# Altium PCB NewFc.PcbDoc
Units mil, origin at the board's own origin, x right, y up, seen from the top; angles counter-clockwise.
Board outline 3470 x 1220 mil, 2 copper layers (Top Layer, Bottom Layer); 2 components, 56 nets, 80 pads, 0 vias.
Unrouted connection lines stored in the file: 22.
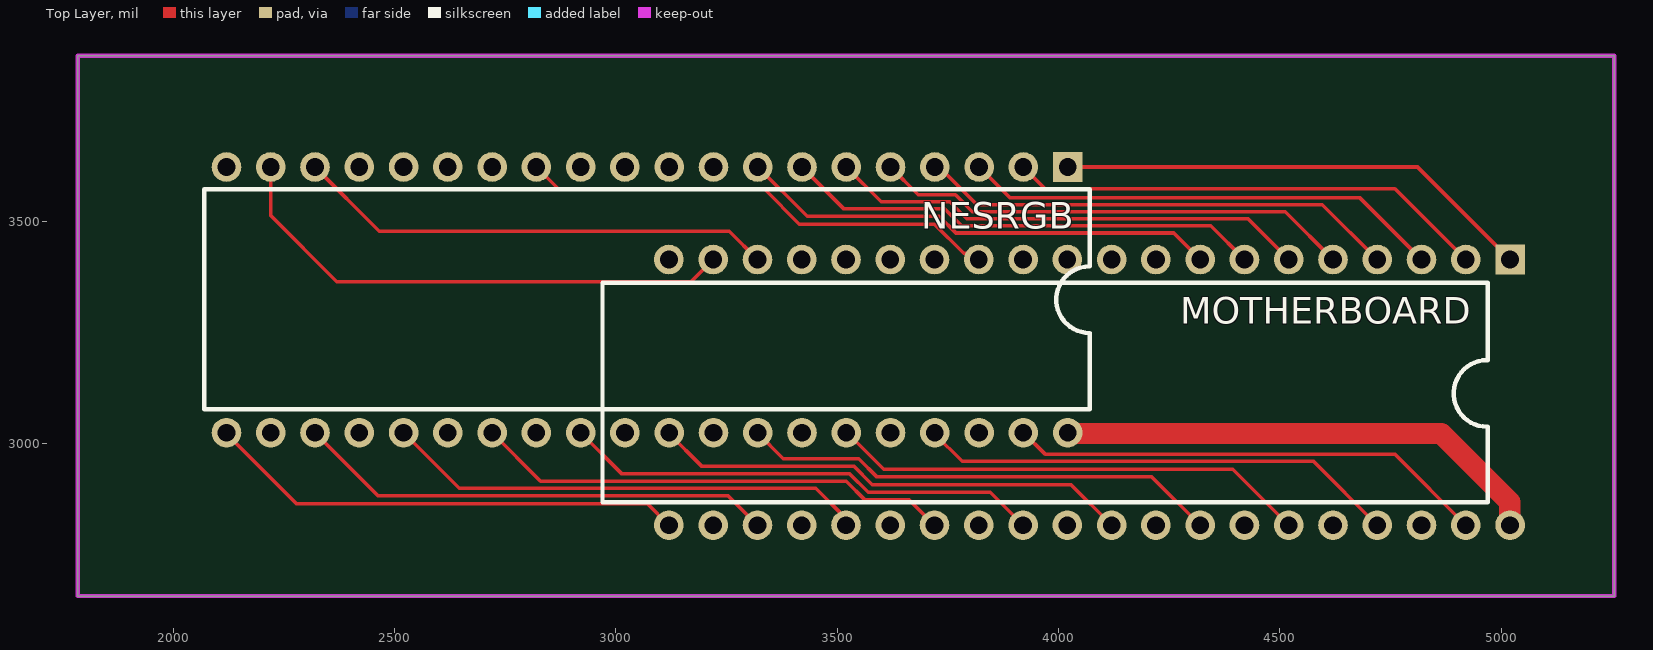
[diagram p0: Top Layer view]
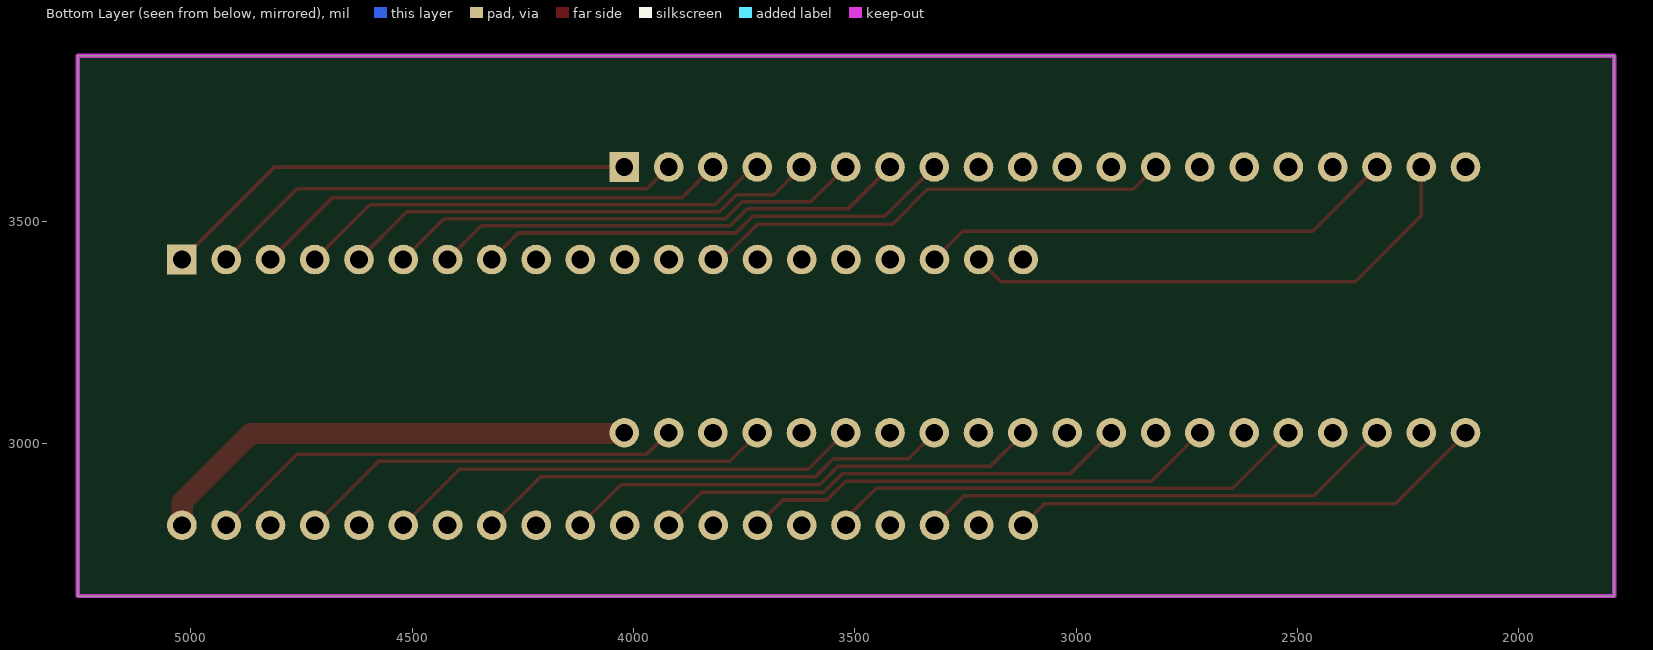
[diagram p1: Bottom Layer view, seen from below]

## Layer stack, top to bottom
Top Solder: solder mask 0.4, Solder Resist, Dk 3.5
Top Layer: signal copper 1.4
Dielectric 1: dielectric 12.6, FR-4, Dk 4.8
Bottom Layer: signal copper 1.4
Bottom Solder: solder mask 0.4, Solder Resist, Dk 3.5

## Board outline
1785,2655 1785,3875 5255,3875 5255,2655

## Design rules (kind name [scope] priority, off if disabled: settings)
Clearance [All] p1: gap=8 ignorepadtopadclearanceinfootprint=FALSE except(0: Arc-Hole Track-Hole SMDPad-Hole THPad-Hole Via-Hole Fill-Hole Poly-Hole Region-Hole Text-Hole)
PolygonConnect [All] p1: connectstyle=Relief reliefconductorwidth=10 reliefentries=4 polygonreliefangle="90 Angle" airgapwidth=10
RoutingVias [All] p1: holewidth=28 width=50 viastyle="Through Hole" minholewidth=28 minwidth=50 maxholewidth=28 maxwidth=50
SolderMaskExpansion [All] p1: expansion=4 istentingtop=FALSE
Width [All] p1: maxlimit=8 minlimit=8 preferedwidth=8 minimp=50.000000 maximp=50.000000 favimp=50.000000
30 further rules are at their usual default settings.

## Classes and differential pairs
component class NewFc: NESRGB

## Components (designator, comment, footprint, x,y, rotation, side; value= is the part's Value field where it differs from the comment)
MOTHERBOARD "PPU" "DIP40-NEW - T" 3945,3135 r270 top
NESRGB "PPU" DIP40-NEW 2945.62,3344.04 r270 top

## Footprints (in the part's own frame and the unit in brackets; to place one, negate y for a bottom-side part, rotate by r counter-clockwise, add the part's x,y. Pads: shape width x height; smd on the part's side, far side on the other; paste and mask are expansions set on the pad)
DIP40-NEW [mil]
  rect 66.93x66.93 hole 40: 1(-280,1075)
  round 66.93 hole 40: 2(-280,975) 3(-280,875) 4(-280,775) 5(-280,675) 6(-280,575) 7(-280,475) 8(-280,375) 9(-280,275) 10(-280,175) 11(-280,75) 12(-280,-25) 13(-280,-125) 14(-280,-225) 15(-280,-325) 16(-280,-425) 17(-280,-525) 18(-280,-625) 19(-280,-725) 20(-280,-825) 21(320,-825) 22(320,-725) 23(320,-625) 24(320,-525) 25(320,-425) 26(320,-325) 27(320,-225) 28(320,-125) 29(320,-25) 30(320,75) 31(320,175) 32(320,275) 33(320,375) 34(320,475) 35(320,575) 36(320,675) 37(320,775) 38(320,875) 39(320,975) 40(320,1075)
  silkscreen extent -229,-875 267,1125
"DIP40-NEW - T" [mil]
  rect 66.93x66.93 hole 40: 1(-280,1075)
  round 66.93 hole 40: 2(-280,975) 3(-280,875) 4(-280,775) 5(-280,675) 6(-280,575) 7(-280,475) 8(-280,375) 9(-280,275) 10(-280,175) 11(-280,75) 12(-280,-25) 13(-280,-125) 14(-280,-225) 15(-280,-325) 16(-280,-425) 17(-280,-525) 18(-280,-625) 19(-280,-725) 20(-280,-825) 21(320,-825) 22(320,-725) 23(320,-625) 24(320,-525) 25(320,-425) 26(320,-325) 27(320,-225) 28(320,-125) 29(320,-25) 30(320,75) 31(320,175) 32(320,275) 33(320,375) 34(320,475) 35(320,575) 36(320,675) 37(320,775) 38(320,875) 39(320,975) 40(320,1075)
  silkscreen extent -228,-975 268,1025

## Part data
MOTHERBOARD NESRGB: library part UMC6528

## Nets (pads, with @x,y where several pads share a name; then routed paths per layer and width w, separated by ;. In a path a pad name is that pad's centre, name@x,y a point inside that pad or via, vN(x,y) a via of type N, cw(c..) or ccw(c..) an arc to the next point about the centre after c; other vN are vias at no path point)
A0: MOTHERBOARD.12 NESRGB.12
A1: MOTHERBOARD.11 NESRGB.11
A2: MOTHERBOARD.10 NESRGB.10
CLK: MOTHERBOARD.18 NESRGB.18 | length 1086
  Top Layer w8: NESRGB.18 2465.66,3479 3256,3479 MOTHERBOARD.18
D0: MOTHERBOARD.2 NESRGB.2 | length 1086
  Top Layer w8: NESRGB.2 3969.66,3575 4760,3575 MOTHERBOARD.2
D1: MOTHERBOARD.3 NESRGB.3 | length 1086
  Top Layer w8: NESRGB.3 3889.66,3555 4680,3555 MOTHERBOARD.3
D2: MOTHERBOARD.4 NESRGB.4 | length 1086
  Top Layer w8: NESRGB.4 3730.96,3624.04 3816,3539 4596,3539 MOTHERBOARD.4
D3: MOTHERBOARD.5 NESRGB.5 | length 1086
  Top Layer w8: NESRGB.5 3683.4,3561.26 3767.19,3561.26 3805.45,3523 4512,3523 MOTHERBOARD.5
D4: MOTHERBOARD.6 NESRGB.6 | length 1086
  Top Layer w8: NESRGB.6 3599.4,3545.26 3754.74,3545.26 3793,3507 4428,3507 MOTHERBOARD.6
D5: MOTHERBOARD.7 NESRGB.7 | length 1086
  Top Layer w8: NESRGB.7 3515.4,3529.26 3743.1,3529.26 3781.36,3491 4344,3491 MOTHERBOARD.7
D6: MOTHERBOARD.8 NESRGB.8 | length 1086
  Top Layer w8: NESRGB.8 3432.11,3512.55 3730.88,3512.55 3768.42,3475 4260,3475 MOTHERBOARD.8
D7: MOTHERBOARD.9 NESRGB.9
DBE: MOTHERBOARD.13 NESRGB.13 | length 1086
  Top Layer w8: NESRGB.13 2871.15,3573.51 3336.15,3573.51 3414.66,3495 3720,3495 3785.85,3429.15 3789.91,3429.15 3804.05,3415 MOTHERBOARD.13
GND: MOTHERBOARD.14 MOTHERBOARD.15 MOTHERBOARD.16 MOTHERBOARD.17 MOTHERBOARD.20 NESRGB.14 NESRGB.15 NESRGB.16 NESRGB.17 NESRGB.20 | length 14
  Top Layer w8: MOTHERBOARD.14 MOTHERBOARD.14@3720,3429
"NetMain Board_21": 
"NetMain Board_22": 
"NetMain Board_23": 
"NetMain Board_24": 
"NetMain Board_25": 
"NetMain Board_26": 
"NetMain Board_27": 
"NetMain Board_28": 
"NetMain Board_29": 
"NetMain Board_30": 
"NetMain Board_31": 
"NetMain Board_32": 
"NetMain Board_33": 
"NetMain Board_34": 
"NetMain Board_35": 
"NetMain Board_36": 
"NetMain Board_37": 
"NetMain Board_38": 
"NetMain Board_39": 
"NetMain Board_40": 
NetMOTHERBOARD_21: MOTHERBOARD.21 NESRGB.21 | length 1087.3
  Top Layer w8: NESRGB.21 2120.62,3021.77 2278.61,2863.79 3071.21,2863.79 MOTHERBOARD.21
NetMOTHERBOARD_22: MOTHERBOARD.22 NESRGB.22
NetMOTHERBOARD_23: MOTHERBOARD.23 NESRGB.23 | length 1086.3
  Top Layer w8: NESRGB.23 2320.62,3023.52 2462.29,2881.85 3253.15,2881.85 MOTHERBOARD.23
NetMOTHERBOARD_24: MOTHERBOARD.24 NESRGB.24
NetMOTHERBOARD_25: MOTHERBOARD.25 NESRGB.25 | length 1084.8
  Top Layer w8: NESRGB.25@2527.79,3017.21 2646.57,2898.43 3451.57,2898.43 3520,2830 MOTHERBOARD.25
NetMOTHERBOARD_26: MOTHERBOARD.26 NESRGB.26
NetMOTHERBOARD_27: MOTHERBOARD.27 NESRGB.27 | length 1086.1
  Top Layer w8: NESRGB.27 2720.62,3023.88 2830.08,2914.43 3520.4,2914.43 3562.96,2871.86 3663.14,2871.86 MOTHERBOARD.27
NetMOTHERBOARD_28: MOTHERBOARD.28 NESRGB.28
NetMOTHERBOARD_29: MOTHERBOARD.29 NESRGB.29 | length 1086
  Top Layer w8: NESRGB.29 2920.68,3024.04 3013.97,2930.75 3528.67,2930.75 3570.02,2889.4 3845.6,2889.4 MOTHERBOARD.29
NetMOTHERBOARD_30: MOTHERBOARD.30 NESRGB.30
NetMOTHERBOARD_31: MOTHERBOARD.31 NESRGB.31 | length 1087.5
  Top Layer w8: NESRGB.31 3120.62,3021.36 3193.48,2948.5 3537.29,2948.5 3579.13,2906.66 4028.34,2906.66 MOTHERBOARD.31
NetMOTHERBOARD_32: MOTHERBOARD.32 NESRGB.32
NetMOTHERBOARD_33: MOTHERBOARD.33 NESRGB.33 | length 1086.5
  Top Layer w8: NESRGB.33 3320.62,3023.19 3378.4,2965.41 3548.53,2965.41 3589.96,2923.98 4211.02,2923.98 MOTHERBOARD.33
NetMOTHERBOARD_34: MOTHERBOARD.34 NESRGB.34
NetMOTHERBOARD_35: MOTHERBOARD.35 NESRGB.35 | length 1086
  Top Layer w8: NESRGB.35 3522.56,3024.04 3605.23,2941.37 4393.63,2941.37 MOTHERBOARD.35
NetMOTHERBOARD_36: MOTHERBOARD.36 NESRGB.36
NetMOTHERBOARD_37: MOTHERBOARD.37 NESRGB.37 | length 1088
  Top Layer w8: NESRGB.37 3720.62,3020.6 3782.23,2959 4576,2959 MOTHERBOARD.37
NetMOTHERBOARD_38: MOTHERBOARD.38 NESRGB.38
NetMOTHERBOARD_39: MOTHERBOARD.39 NESRGB.39 | length 1086
  Top Layer w8: NESRGB.39 3921.13,3024.04 3969.57,2975.6 4759.4,2975.6 MOTHERBOARD.39
NetMOTHERBOARD_40: MOTHERBOARD.40 NESRGB.40 | length 1116.2
  Top Layer w48: NESRGB.40 4022.78,3021.89 4864.71,3021.89 5019.22,2867.37 5019.22,2815.78 MOTHERBOARD.40
NMI: MOTHERBOARD.19 NESRGB.19 | length 1191.6
  Top Layer w8: NESRGB.19 2220.62,3514.38 2370,3365 3170,3365 MOTHERBOARD.19
R/W: MOTHERBOARD.1 NESRGB.1 | length 1086
  Top Layer w8: NESRGB.1 4810.96,3624.04 MOTHERBOARD.1

## Keep-outs
Keep-Out Layer:
  the board outline again, w10